# Allegro board RFID_Cali_Kit1.brd
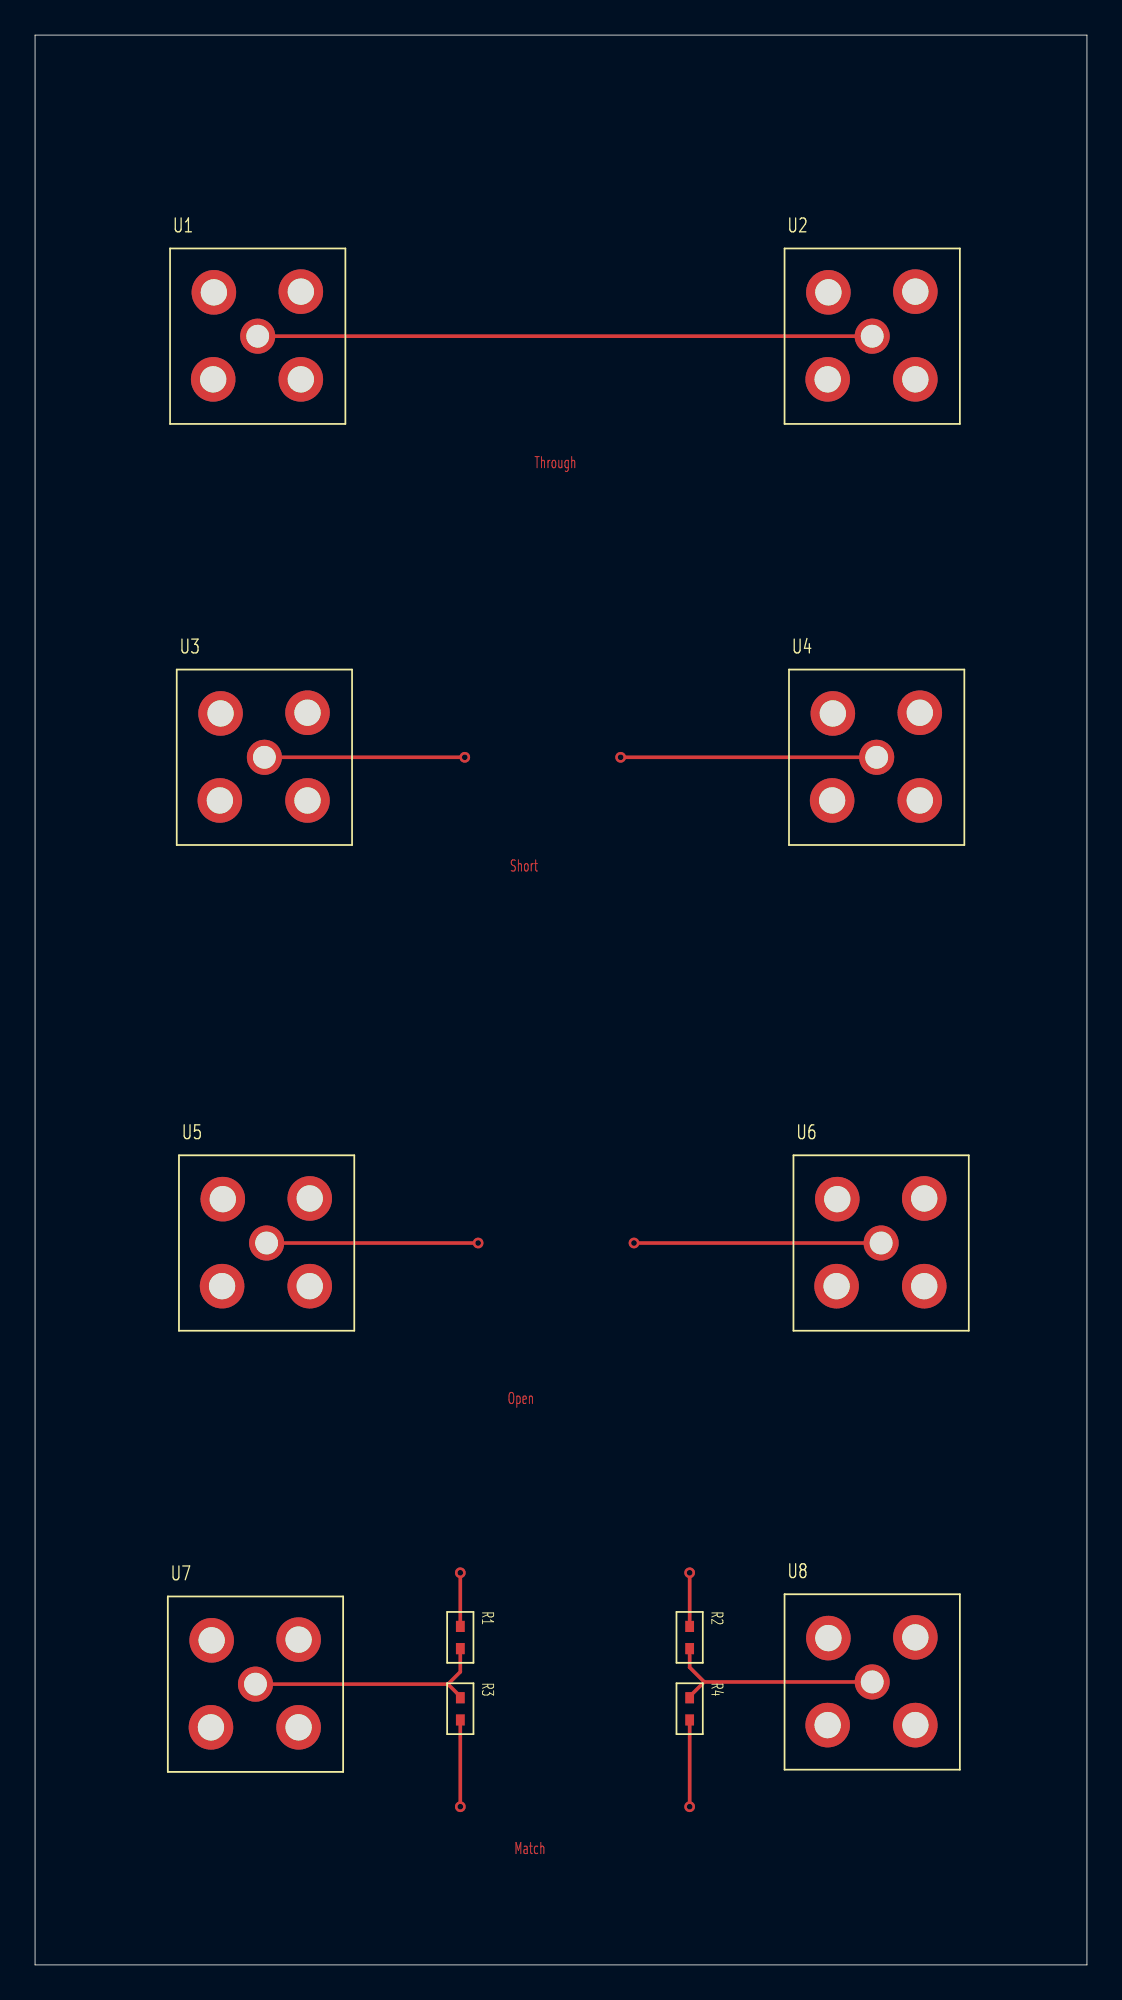
[diagram p0: board, top side]
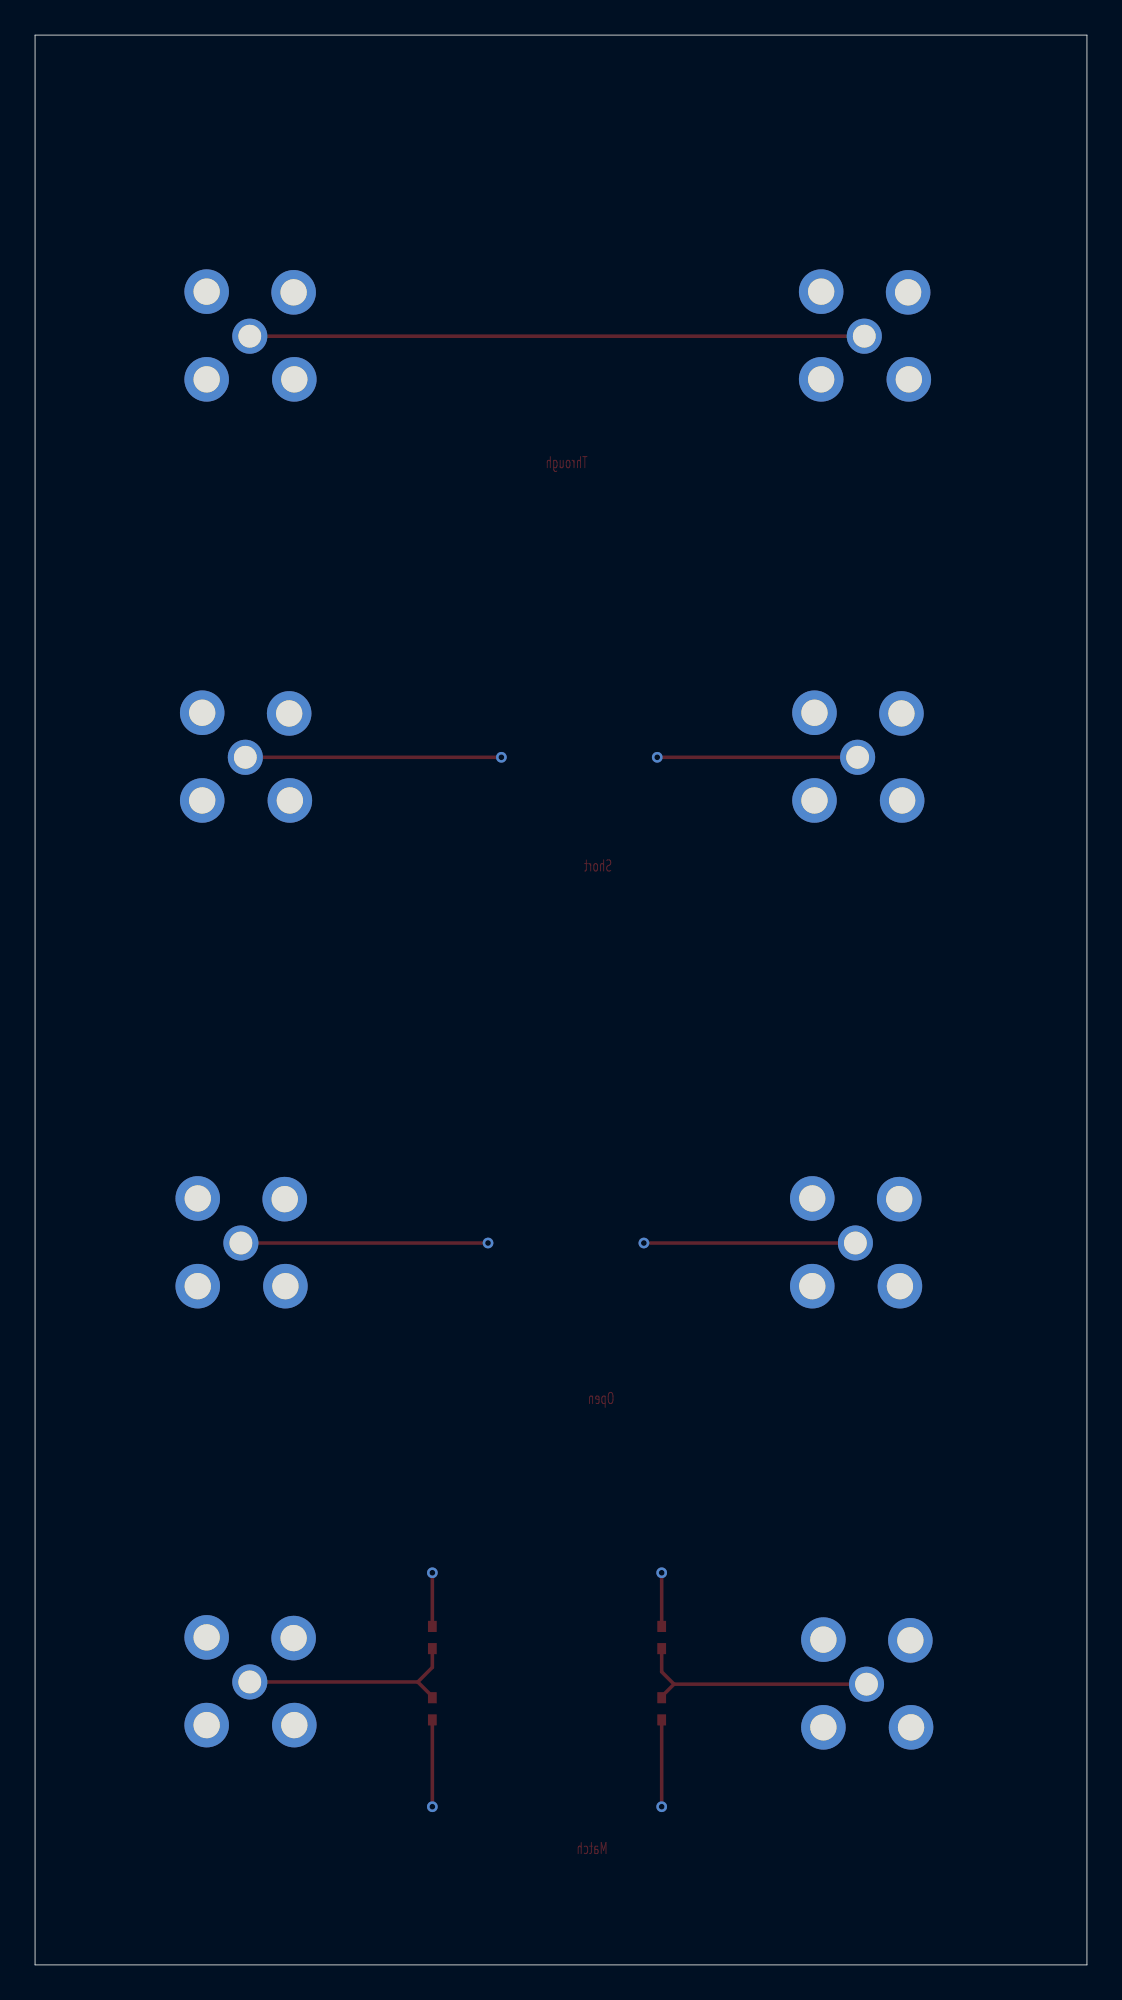
[diagram p1: board, bottom side, seen from below]

Outline 60 x 110 mm; copper layers: TOP, LAYER1, LAYER2, BOTTOM. Coordinates in mm from the lower left corner of the outline.
Outline path: 0,110 60,110 60,0 0,0 0,110

## Placement (name value [footprint] x y rotation side)
R1  RESISTOR=100  [R0402]  24.26 18.67 270 top
R2  RESISTOR=100  [R0402]  37.34 18.67 270 top
R3  RESISTOR=100  [R0402]  24.26 14.61 270 top
R4  RESISTOR=100  [R0402]  37.34 14.61 270 top
U1  -  [SMA]  12.7 92.84 0 top
U2  -  [SMA]  47.75 92.84 0 top
U3  -  [SMA]  13.08 68.83 0 top
U4  -  [SMA]  48.01 68.83 0 top
U5  -  [SMA]  13.21 41.15 0 top
U6  -  [SMA]  48.26 41.15 0 top
U7  -  [SMA]  12.57 16 0 top
U8  -  [SMA]  47.75 16.13 0 top

## Library data of the parts
R1-R4 = RESISTOR
U1-U8 = SMA

## Footprints (pads in the part's own frame, mm; a bottom-side part is the same pattern mirrored in y, then rotated)
R0402
  rect 0.635x0.5 smd: 1(-0.625,0) 2(0.64,0)
SMA
  round 2.54 hole 1.5: 1(-2.5,2.5) 2(2.46,2.54) 3(-2.54,-2.46) 4(2.46,-2.46)
  round 2 hole 1.3: 5(0,0)

## Nets
GND1: U1.1(GND1) U1.2(GND2) U1.3(GND3) U1.4(GND4) U2.1(GND1) U2.2(GND2) U2.3(GND3) U2.4(GND4)
GND2: U3.1(GND1) U3.2(GND2) U3.3(GND3) U3.4(GND4) U3.5(RF) U4.1(GND1) U4.2(GND2) U4.3(GND3) U4.4(GND4) U4.5(RF)
GND3: U5.1(GND1) U5.2(GND2) U5.3(GND3) U5.4(GND4) U6.1(GND1) U6.2(GND2) U6.3(GND3) U6.4(GND4)
GND4: R1.1 R2.1 R3.2 R4.2 U7.1(GND1) U7.2(GND2) U7.3(GND3) U7.4(GND4) U8.1(GND1) U8.2(GND2) U8.3(GND3) U8.4(GND4)
O1: U5.5(RF)
O2: U6.5(RF)
N00076: U1.5(RF) U2.5(RF)
N01403: R1.2 R3.1 U7.5(RF)
N01412: R2.2 R4.1 U8.5(RF)

## Via types
v1: diameter 0.61, hole 0.33, TOP to BOTTOM, 8 vias

## Routing (per net, layer and track width the routed paths; a pad name or vN(x,y) marks a point on that pad's centre or on a via; arc(x,y) is an arc through that point)
GND2: length 26
  TOP w0.203: U3.5 v1(24.51,68.83) ; U4.5 v1(33.4,68.83)
GND4: length 16
  TOP w0.203: R3.2 v1(24.26,9.02) ; R1.1 v1(24.26,22.35) ; R2.1 v1(37.34,22.35) ; R4.2 v1(37.34,9.02)
O1: length 12.1
  TOP w0.203: U5.5 v1(25.27,41.15)
O2: length 14.1
  TOP w0.203: U6.5 v1(34.16,41.15)
N00076: length 35.1
  TOP w0.203: U1.5 U2.5
N01403: length 14.4
  TOP w0.203: 23.55,16 U7.5 ; 23.55,16 24.26,16.71 R1.2 ; 23.55,16 24.26,15.3
  TOP w0.254: R3.1 24.26,15.3
N01412: length 13.1
  TOP w0.203: 38.17,16.13 37.34,16.96 R2.2 ; 38.17,16.13 37.34,15.3 ; 38.17,16.13 U8.5
  TOP w0.254: 37.34,15.3 R4.1

## Copper pours and planes (outline as drawn; the poured copper is in the pictures)
GND1 on LAYER1: 1,82.17 1,108.84 59,108.84 59,82.17
GND2 on LAYER1: 1.02,78.23 1.02,59.05 58.93,59.05 58.93,78.23
GND3 on LAYER2: 1.27,28.57 1.27,53.34 59,53.34 59,28.57
GND4 on LAYER2: 1.27,4.45 1.27,24.13 59,24.13 59,4.45

## Text on the board
TOP: Open | Short | Match | Through
